# EAGLE board led_display_4x7 (EAGLE 6.5.0)
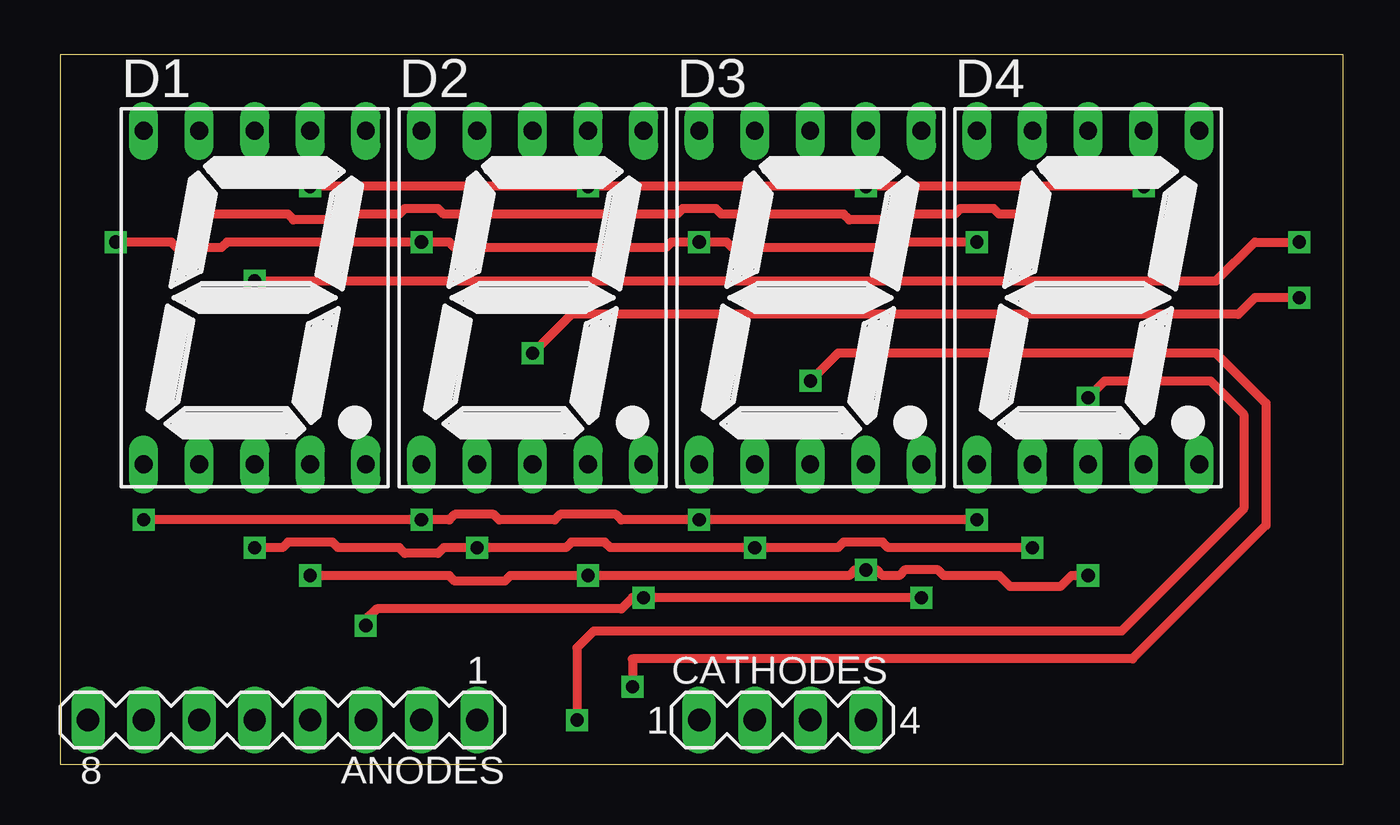
[diagram p0: board, top side]
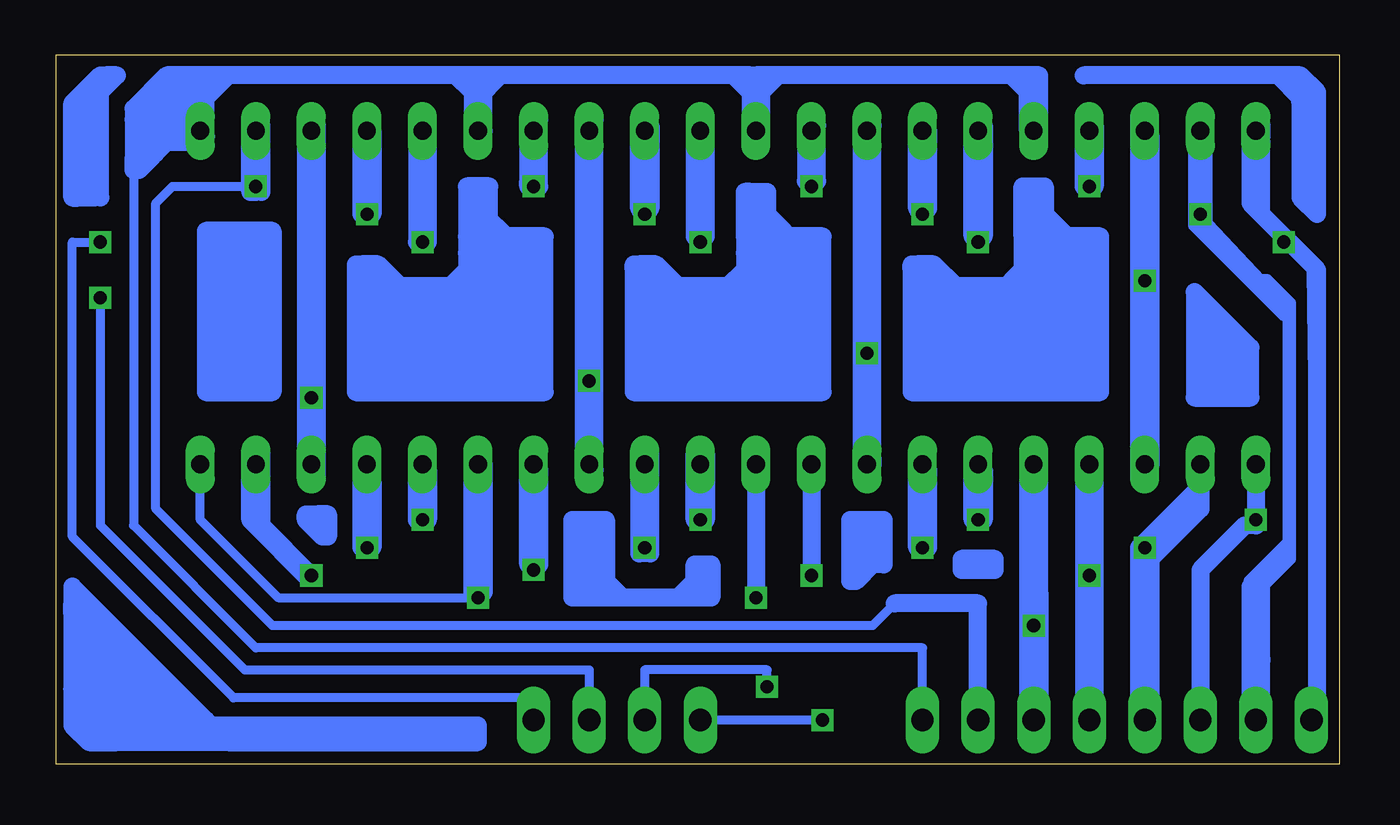
[diagram p1: board, bottom side, seen from below]

Size 58.65 x 32.44 mm. Coordinates in mm from the lower left corner, seen from the top.
Outline: 0,0 58.65,0 58.65,32.44 0,32.44 0,0
Copper layers (1*16): Top 0.035mm / dielectric 1.5mm / Bottom 0.035mm
Design rules "default": minimum track width 10mil, minimum drill 24mil, track to track 8mil, track to pad 8mil, pad to pad 8mil, via to via 8mil, smd to smd 8mil, copper to edge 40mil, drill to drill 8mil, minimum pad ring 10mil, minimum via ring 8mil, stop-mask expansion 4mil, vias tented up to drill 0mil, thermal gap 10mil

## Footprints (pad centres in the part's own frame; a part is rotated, then mirrored left to right if it is on the bottom)
MA08-1 = drill 1.016 long: 1 -8.89,0; 2 -6.35,0; 3 -3.81,0; 4 -1.27,0; 5 1.27,0; 6 3.81,0; 7 6.35,0; 8 8.89,0
MA04-1 = drill 1.016 long: 1 -3.81,0; 2 -1.27,0; 3 1.27,0; 4 3.81,0
7SEG-13 = drill 0.813 long: 1 -5.08,-7.62; 2 -2.54,-7.62; 3 0,-7.62; 4 2.54,-7.62; 5 5.08,-7.62; 6 5.08,7.62; 7 2.54,7.62; 8 0,7.62; 9 -2.54,7.62; 10 -5.08,7.62

## Placement (x,y rotation side)
ANODES  [MA08-1]  10.16,2.03 180 top
CATHODES  [MA04-1]  33.02,2.03 0 top
D1  [7SEG-13]  8.89,21.34 0 top
D2  [7SEG-13]  21.59,21.34 0 top
D3  [7SEG-13]  34.29,21.34 0 top
D4  [7SEG-13]  46.99,21.34 0 top

## Library data of the parts
ANODES CATHODES = con-lstb; OC_FARNELL: unknown; OC_NEWARK: unknown
D1-D4 = special

## Nets
F: ANODES.7 D1.9 D2.9 D3.9 D4.9
G: ANODES.8 D1.10 D2.10 D3.10 D4.10
N$1: ANODES.5 D1.2 D2.2 D3.2 D4.2
N$2: ANODES.6 D1.1 D2.1 D3.1 D4.1
N$3: ANODES.4 D1.4 D2.4 D3.4 D4.4
N$4: ANODES.2 D1.7 D2.7 D3.7 D4.7
N$5: ANODES.1 D1.6 D2.6 D3.6 D4.6
N$7: CATHODES.1 D4.3 D4.8
N$8: CATHODES.2 D3.3 D3.8
N$9: CATHODES.3 D2.3 D2.8
N$10: CATHODES.4 D1.3 D1.8
POINT: ANODES.3 D1.5 D2.5 D3.5 D4.5

## Tracks (layer width: path | path; a pad name or v marks a point on that pad's centre or on a via)
F  (via drill 0.6)
  Top 0.406: v6.35,25.15 10.41,25.15 10.67,24.89 12.19,24.89 12.45,25.15 15.49,25.15 15.75,25.4 17.27,25.4 17.53,25.15 v19.05,25.15 28.19,25.15 28.45,25.4 29.97,25.4 30.23,25.15 v31.75,25.15 35.81,25.15 36.07,24.89 37.59,24.89 37.85,25.15 40.89,25.15 41.15,25.4 42.67,25.4 42.93,25.15 v44.45,25.15
  Bottom 0.406: v6.35,25.15 2.54,21.08 | 2.54,20.83 2.29,20.57 | 2.29,10.16 2.29,9.65 2.54,9.65 | D2.9 v19.05,25.15 | D3.9 v31.75,25.15
  Bottom 0.61: 3.05,21.34 2.29,20.57 | 2.29,20.57 2.29,10.16 | 2.29,10.16 2.29,9.4 3.56,8.13 4.06,8.13 4.06,8.38 2.29,10.16 | 2.29,20.57 2.29,21.08 3.3,22.1 3.56,22.1 | 2.29,20.57 2.54,20.57 6.6,24.64 6.6,28.96 6.1,28.96 6.1,24.64
  Bottom 0.813: 6.6,28.96 D1.9 v6.35,25.15 6.35,24.64 3.05,21.34 2.54,20.83 2.54,21.08 | 44.45,29.21 D4.9 | D4.9 v44.45,25.15 | v31.75,25.15 31.75,29.21 | 3.56,4.83 ANODES.7 3.81,4.57 | 3.81,7.87 3.81,8.13 2.54,9.65 | 19.05,29.46 v19.05,25.15 | 18.8,28.96 18.8,25.4 v19.05,25.15 | v19.05,25.15 19.3,25.4 19.3,29.46 | 31.5,29.21 31.5,25.4 v31.75,25.15 | v31.75,25.15 32,25.4 32,29.21 | D4.9 44.2,28.96 44.2,25.15 44.7,25.15 44.7,29.21 | 3.81,4.57 3.81,7.87 | 3.81,7.87 4.06,8.13 4.06,2.29 | 3.81,4.57 3.56,2.03 3.56,8.38 2.79,9.14
G  (via drill 0.6)
  Top 0.406: v2.54,23.88 5.08,23.88 5.33,23.62 7.37,23.62 7.62,23.88 v16.51,23.88 17.78,23.88 18.03,23.62 27.69,23.62 27.94,23.88 v29.21,23.88 30.48,23.88 30.73,23.62 38.1,23.62 38.35,23.88 v41.91,23.88
  Bottom 0.406: ANODES.8 1.02,2.79 1.27,22.61 v2.54,23.88 3.81,25.15 3.81,25.4 | 3.81,26.16 3.81,28.19 D1.10 | D2.10 v16.51,23.88 | D3.10 v29.21,23.88 | D4.10 v41.91,23.88
  Bottom 0.813: 3.56,25.15 1.02,22.61 1.02,2.79 | 3.56,28.7 D1.10 4.06,29.21 4.06,25.65 3.81,25.4 | v29.21,23.88 29.21,29.21 | v16.51,23.88 16.51,29.21 | 16.26,29.21 16.26,24.13 v16.51,23.88 | v16.51,23.88 16.76,24.13 16.76,29.21 | v29.21,23.88 28.96,24.13 28.96,28.7 29.46,28.7 29.46,26.42 | 29.46,26.42 29.46,24.13 v29.21,23.88 | v29.21,23.88 29.21,26.16 29.46,26.42 | 3.81,26.16 3.81,25.4 | 3.81,25.4 3.56,25.15 | 3.56,25.15 3.56,28.45 | 3.56,28.45 3.56,28.7 | 3.81,29.21 3.56,29.21 3.56,28.7 | 3.56,28.45 3.81,28.19
N$1  (via drill 0.6)
  Top 0.406: v8.89,9.91 10.16,9.91 10.41,10.16 12.45,10.16 12.7,9.91 15.49,9.91 15.75,9.65 17.27,9.65 17.53,9.91 v19.05,9.91 23.11,9.91 23.37,10.16 24.89,10.16 25.15,9.91 v31.75,9.91 35.56,9.91 35.81,10.16 37.59,10.16 37.85,9.91 v44.45,9.91
  Bottom 0.406: ANODES.5 v8.89,9.91 6.35,12.45 6.35,12.7 D1.2
  Bottom 0.813: 9.14,1.78 9.14,9.91 6.35,12.7 | 6.35,12.7 6.35,13.97 | 6.35,12.7 6.35,11.68 8.64,9.4 8.64,2.03 ANODES.5 | D2.2 v19.05,9.91 | D4.2 v44.45,9.91 | 31.75,14.22 D3.2 v31.75,9.91 31.5,9.65 | 31.5,9.65 31.5,14.22 32,14.22 32,9.65 31.5,9.65
N$2  (via drill 0.6)
  Top 0.406: v3.81,11.18 v16.51,11.18 17.78,11.18 18.03,11.43 19.81,11.43 20.07,11.18 22.61,11.18 22.86,11.43 25.4,11.43 25.65,11.18 v29.21,11.18 v41.91,11.18
  Bottom 0.406: ANODES.6 6.35,8.64 v3.81,11.18 D1.1
  Bottom 0.813: D1.1 3.81,10.92 4.32,10.92 6.35,8.89 ANODES.6 | v16.51,11.18 D2.1 16.26,13.46 16.26,11.18 16.76,11.18 16.76,13.72 | 29.46,13.72 29.46,11.43 v29.21,11.18 D3.1 28.96,13.97 | D4.1 v41.91,11.18
N$3  (via drill 0.6)
  Top 0.406: v11.43,8.64 17.78,8.64 18.03,8.38 20.32,8.38 20.57,8.64 v24.13,8.64 36.07,8.64 36.32,8.89 v36.83,8.89 37.34,8.89 37.59,8.64 38.35,8.64 38.61,8.89 40.13,8.89 40.39,8.64 42.93,8.64 43.43,8.13 45.72,8.13 46.23,8.64 v46.99,8.64
  Bottom 0.406: 11.43,9.91 v11.43,8.64 ANODES.4 | D4.4 49.53,11.18
  Bottom 0.813: 11.43,4.57 ANODES.4 | D2.4 v24.13,8.64 | D3.4 v36.83,8.89 | 49.53,11.18 49.53,10.92 | 49.53,10.92 47.24,8.64 v46.99,8.64 49.28,10.92 | 11.43,13.97 D1.4 11.43,9.91 ANODES.4 | ANODES.4 11.18,1.78 11.18,13.72 11.43,13.97 | 11.43,13.97 11.68,13.97 11.68,1.78 ANODES.4 | 49.28,10.92 49.53,11.18 | 49.53,11.18 49.53,13.97 49.28,14.22 49.28,10.92 | 49.28,10.92 49.53,10.92 | 49.53,10.92 49.78,11.18 49.78,14.22
N$4  (via drill 0.6)
  Top 0.406: v11.43,26.42 v24.13,26.42 v36.83,26.42 v49.53,26.42
  Bottom 0.406: D3.7 v36.83,26.42 | v49.53,26.42 53.34,26.42 54.1,25.65 54.1,11.68 48.77,6.35 21.34,6.35 20.32,7.37
  Bottom 0.813: v11.43,26.42 D1.7 | D4.7 v49.53,26.42 | 37.08,28.96 37.08,26.67 | 37.08,26.67 v36.83,26.42 | v36.83,26.42 36.58,26.42 36.58,29.46 | D2.7 v24.13,26.42 | ANODES.2 16.51,7.37 20.32,7.37 | v24.13,26.42 23.88,26.67 23.88,29.21 24.38,29.21 24.38,26.67 v24.13,26.42 | v36.83,26.42 37.08,26.42 37.08,26.67
N$5
  Bottom 0.406: ANODES.1 19.05,5.33 49.53,5.33 55.12,10.92 55.12,27.18 55.12,29.46 53.34,31.5 52.07,31.5 | 52.07,31.5 50.8,31.5 | D1.6 13.97,31.24 13.97,31.5 14.22,31.5 | 52.07,31.24 52.07,31.5
  Bottom 0.813: 14.22,28.96 14.22,30.73 | 14.22,30.73 14.22,30.99 13.97,31.24 14.22,31.5 | 14.22,31.5 14.99,31.5 | 14.99,31.5 25.65,31.5 | 25.65,31.5 26.67,31.5 | 26.92,31.5 27.69,31.5 | 27.69,31.5 38.35,31.5 | 38.35,31.5 39.12,31.5 | 39.37,31.5 39.62,31.5 | 39.62,31.5 40.39,31.5 | 40.39,31.5 50.8,31.5 | 50.8,31.5 53.34,31.5 53.59,31.5 55.12,29.97 55.12,29.46 55.12,27.69 | D4.6 52.07,30.48 | 52.07,30.48 52.07,31.24 | 39.37,30.48 D3.6 39.62,28.7 | 39.37,30.48 39.37,31.5 | 13.72,28.96 13.72,31.5 14.22,31.5 | D2.6 26.67,30.48 | 26.67,30.48 26.67,31.5 | 39.12,28.96 39.12,31.5 | 39.12,31.5 39.37,31.5 | 39.62,31.5 39.62,30.73 | 39.62,30.73 39.62,28.96 39.37,28.7 | 26.92,31.5 26.92,29.21 26.42,29.72 26.42,30.73 | 26.42,30.73 26.42,31.24 | 55.12,27.18 55.12,27.69 | 55.12,27.69 54.61,27.69 53.34,28.96 53.34,28.45 | 53.34,28.45 53.09,28.45 | 53.09,28.45 52.32,28.45 52.83,28.96 52.83,28.7 53.09,28.45 | 53.34,28.45 53.59,28.45 | 53.59,28.45 54.1,28.45 54.1,27.94 55.12,27.18 | 55.12,27.69 54.86,28.19 53.59,28.45 | 53.59,28.45 54.86,27.18 55.12,27.18 | 55.12,27.18 54.61,29.46 54.61,29.72 53.34,30.99 52.58,30.99 52.58,29.46 52.83,29.21 54.1,29.21 54.36,28.96 54.36,29.21 52.83,30.73 52.83,29.97 53.34,29.46 | 52.07,30.48 51.82,30.48 50.8,31.5 | 39.62,30.73 40.39,31.5 | 39.37,30.48 38.35,31.5 | 26.67,30.48 27.69,31.5 | 26.92,31.5 26.67,31.5 | 25.65,31.5 26.42,30.73 | 14.22,30.73 14.99,31.5
N$6
  Bottom 0.813: 56.64,25.91 56.64,30.73 | 56.9,30.48 56.64,30.73 | 56.9,30.48 56.9,30.73 | 56.9,30.48 56.9,25.91 57.66,25.91 | 56.39,31.5 56.64,31.5 57.91,30.23 57.91,25.91 57.66,25.91 | 56.13,31.5 55.88,31.5 56.64,30.73 | 56.13,31.5 57.4,30.23 57.4,26.16 | 56.13,31.5 56.39,31.5 | 56.39,31.5 56.9,30.99 | 57.66,25.91 57.15,26.16
N$7  (via drill 0.6)
  Top 0.406: v46.99,16.76 47.75,17.53 52.58,17.53 54.1,16 54.1,11.68 48.51,6.1 24.38,6.1 23.62,5.33 v23.62,2.03
  Bottom 0.406: v23.62,2.03 CATHODES.1 | D4.8 v46.99,16.76 D4.3
  Bottom 0.813: D4.8 46.99,13.46
N$8  (via drill 0.6)
  Top 0.406: v34.29,17.53 35.56,18.8 52.83,18.8 55.12,16.51 55.12,10.92 49.02,4.83 26.16,4.83 v26.16,3.56
  Bottom 0.406: v34.29,17.53 D3.3 | v26.16,3.56 26.16,4.32 31.75,4.32 CATHODES.2
  Bottom 0.813: D3.8 D3.3
N$9  (via drill 0.6)
  Top 0.406: v56.64,21.34 54.61,21.34 53.85,20.57 23.37,20.57 v21.59,18.8
  Bottom 0.406: D2.3 v21.59,18.8 D2.8 | v56.64,21.34 56.64,10.92 50.04,4.32 34.29,4.32 CATHODES.3
  Bottom 0.813: D2.8 D2.3 21.34,13.97 | 21.34,13.97 21.34,13.72 | 21.34,13.97 21.34,29.21 21.84,29.21 21.84,13.46
N$10  (via drill 0.6)
  Top 0.406: v8.89,22.1 52.83,22.1 54.61,23.88 v56.64,23.88
  Bottom 0.406: D1.8 v8.89,22.1 D1.3 | CATHODES.4 36.83,3.05 50.55,3.05 57.91,10.41 57.91,23.88 v56.64,23.88
  Bottom 0.813: D1.8 8.89,13.21
N$11
  Bottom 0.813: 42.16,28.96 42.16,23.88 41.66,23.88 41.66,29.21 42.16,29.21
N$12
  Bottom 0.813: 50.8,1.02 55.88,1.02 | 56.64,2.03 55.63,1.02 57.66,1.78 | 56.64,2.03 51.82,2.03 | 51.82,2.03 50.8,1.02 | 51.82,2.03 57.91,8.13 57.91,7.37 | 57.66,1.78 57.91,3.56 | 57.91,4.83 56.64,2.03 | 57.66,1.78 57.91,1.78 | 57.91,4.83 57.91,3.56 | 57.91,2.54 57.91,1.78 | 57.91,1.78 57.15,1.02 55.88,1.02 | 55.88,1.02 57.91,3.05 | 57.91,3.56 57.91,3.05 | 57.91,3.05 57.91,2.54 | 57.91,2.54 57.4,1.78 57.4,3.56 57.15,3.81 | 57.15,3.81 57.66,3.81 57.91,4.83 | 57.91,6.86 57.91,7.37 | 55.88,4.57 53.59,2.29 54.86,2.29 56.9,4.32 | 54.61,2.79 56.39,4.57 56.39,4.83 56.9,4.32 | 56.9,4.32 56.9,3.3 55.37,1.78 55.37,1.52 55.12,1.27 51.82,1.27 55.37,4.83 | 57.91,7.37 55.37,4.83 | 55.37,4.83 56.13,4.83 57.91,6.86 | 57.91,6.86 57.91,4.83 | 57.66,1.78 57.15,3.81 | 57.15,3.81 57.15,4.32 | 57.15,4.32 57.15,5.08 57.66,5.59 57.66,5.08 57.15,4.32 | 50.8,1.02 39.37,1.02 39.37,1.78 40.89,1.78 | 40.89,1.78 52.07,1.78 | 40.89,1.78 41.4,1.27
N$13
  Bottom 0.813: 15.75,20.57 15.75,21.34 14.22,22.86
N$14
  Bottom 0.813: 2.79,31.5 2.29,31.5 1.78,31.5 1.02,30.73 1.02,25.15 1.78,25.91 1.78,30.23 | 2.79,31.5 1.78,30.48 | 1.78,30.48 1.27,29.97 1.52,29.97 1.78,30.23 | 1.78,30.23 1.78,30.48 | 2.79,31.5 11.68,31.5
N$16
  Bottom 0.813: 49.53,26.16 49.78,26.16 49.78,29.21 | 49.53,26.16 49.53,29.21 | 49.28,29.21 49.28,26.16 49.53,26.16
N$18
  Bottom 0.813: 6.6,16.76 6.6,21.59 4.06,19.05 4.06,16.76 4.32,16.76 | 6.6,16.76 4.32,16.76 | 4.32,16.76 4.32,18.29 6.35,20.32 6.35,17.27 6.1,17.02 4.83,17.02 4.57,17.27 4.57,17.78 5.84,19.05 5.84,17.53 5.33,17.53 | 5.08,17.53 5.33,17.53 | 5.33,17.53 5.59,17.78 5.84,17.78 6.1,18.03 6.1,17.27 6.6,16.76
N$19
  Bottom 0.813: 19.3,17.02 19.3,22.61 19.56,22.86 | 19.56,22.86 19.3,22.86 | 18.54,22.86 19.3,22.86 | 19.3,22.86 19.56,22.61 | 19.56,22.61 19.56,17.02 19.3,17.02 | 19.3,17.02 10.92,17.02 10.92,24.13 12.45,24.13 | 12.45,24.13 12.95,24.13 | 13.46,24.13 14.48,24.13 | 14.48,24.13 14.48,23.37 | 14.48,22.61 14.48,22.1 14.22,21.84 17.53,21.84 18.54,22.86 | 18.54,22.86 18.54,22.1 18.8,21.84 18.8,17.78 11.43,17.78 11.43,22.61 | 11.43,22.61 11.43,23.11 11.68,23.37 11.68,23.62 14.22,23.62 14.48,23.37 | 14.48,23.37 14.48,22.61 | 14.48,22.61 13.72,21.84 11.43,21.84 11.18,22.1 11.94,22.1 12.95,23.11 12.19,23.11 12.7,22.61 | 12.7,22.61 13.97,22.61 13.97,23.11 11.94,23.11 11.43,22.61 | 11.43,22.61 12.7,22.61 | 12.7,22.61 13.97,21.34 18.03,21.34 18.54,21.84 | 19.56,22.61 19.56,22.86 | 13.97,21.84 13.97,23.62 14.48,24.13 | 14.48,24.13 14.48,26.42 13.72,26.42 | 13.72,26.42 13.72,24.89 12.95,24.13 | 12.95,24.13 13.46,24.13 | 13.46,24.13 13.97,24.64 | 13.72,26.42 13.46,26.42 13.46,25.15 12.45,24.13
N$20
  Bottom 0.813: 32,17.02 23.62,17.02 23.62,24.13 25.65,24.13 | 26.16,24.13 27.18,24.13 | 27.18,24.13 27.18,23.37 | 27.18,22.61 27.18,22.1 26.92,21.84 27.94,21.84 | 27.94,21.84 30.23,21.84 | 31.5,17.78 24.13,17.78 24.13,22.61 | 24.13,22.61 24.13,23.11 24.38,23.37 24.38,23.62 26.92,23.62 27.18,23.37 | 27.18,23.37 27.18,22.61 | 27.18,22.61 26.42,21.84 24.13,21.84 23.88,22.1 24.64,22.1 25.65,23.11 24.89,23.11 25.4,22.61 | 25.4,22.61 26.67,22.61 26.67,23.11 24.64,23.11 24.13,22.61 | 24.13,22.61 25.4,22.61 | 25.4,22.61 26.67,21.34 30.73,21.34 | 27.94,21.84 27.18,22.61 | 27.18,24.13 27.18,25.91 | 27.18,25.91 26.92,26.16 | 26.92,26.16 27.18,26.16 27.18,25.91 | 26.92,26.16 26.42,26.16 | 26.42,26.16 26.42,25.4 | 26.42,25.4 26.42,24.89 25.65,24.13 | 25.65,24.13 26.16,24.13 | 26.16,24.13 26.67,24.64 | 26.42,26.16 26.16,26.16 26.16,24.89 25.91,24.89 | 25.91,24.89 25.4,24.38 | 25.91,24.89 26.42,25.4
N$21
  Bottom 0.813: 32,17.02 32,22.61 32.26,22.86 | 32.26,22.86 32,22.86 | 31.24,22.86 32,22.86 | 32,22.86 32.26,22.61 | 32.26,22.61 32.26,21.59 32.26,17.02 32,17.02 | 32,17.02 23.62,17.02 | 26.92,21.84 30.23,21.84 31.24,22.86 | 31.24,22.86 31.24,22.1 31.5,21.84 31.5,17.78 24.13,17.78 | 26.67,21.34 30.73,21.34 31.24,21.84 | 32.26,22.61 32.26,22.86
N$22
  Bottom 0.813: 38.1,24.13 36.32,24.13 36.32,17.02 44.7,17.02 | 38.1,24.13 38.86,24.13 | 38.86,24.13 39.62,24.13 | 39.88,24.13 39.88,23.37 | 39.88,22.61 39.88,22.1 39.62,21.84 42.93,21.84 43.94,22.86 | 36.83,22.61 36.83,17.78 44.2,17.78 44.2,21.84 43.94,22.1 43.94,22.86 | 36.83,22.61 36.83,23.11 37.08,23.37 37.08,23.62 39.62,23.62 39.88,23.37 | 39.88,23.37 39.88,22.61 | 39.88,22.61 39.12,21.84 36.83,21.84 36.58,22.1 37.34,22.1 38.35,23.11 37.59,23.11 38.1,22.61 | 38.1,22.61 39.37,22.61 39.37,23.11 37.34,23.11 36.83,22.61 | 36.83,22.61 38.1,22.61 | 38.1,22.61 39.37,21.34 43.43,21.34 43.94,21.84 | 39.88,22.61 40.89,21.59 43.69,21.59 44.7,22.61 | 44.7,17.02 44.7,22.61 | 44.7,22.61 44.96,22.86 | 44.96,22.86 44.7,22.86 | 43.94,22.86 44.7,22.86 | 44.7,22.86 44.96,22.61 44.96,17.02 44.7,17.02 | 44.96,22.86 44.96,22.1 43.94,21.08 | 38.86,24.13 38.86,26.42 39.88,26.42 39.88,24.13 | 39.88,24.13 39.62,24.13 | 39.62,24.13 39.37,24.38 39.37,25.91 | 39.12,25.4 39.12,25.15 38.1,24.13
N$23
  Bottom 0.813: 11.18,29.21 11.18,26.42 11.68,26.42 11.68,29.21
N$24
  Bottom 0.813: 48.77,24.38 51.82,24.38 51.82,17.02 48.77,17.02 48.77,24.38
N$25
  Bottom 0.813: 8.64,28.7 8.64,13.72 9.14,13.72 9.14,28.96
N$26
  Bottom 0.813: 19.05,13.97 19.05,13.72 18.8,13.46 18.8,9.91 19.3,9.91 19.3,13.97
N$27
  Bottom 0.813: 51.82,28.7 51.82,31.24 52.32,31.24 52.32,28.96 52.07,28.7
N$28
  Bottom 0.813: 28.96,14.22 28.96,11.18 29.46,11.18 | 29.21,13.97 29.21,11.43 29.46,11.18 | 29.46,11.18 29.46,14.22
N$29
  Bottom 0.813: 30.23,7.62 28.7,7.62 28.7,7.87 | 30.23,7.62 32.77,7.62 | 33.78,7.62 35.05,7.62 35.05,11.18 33.53,11.18 33.53,8.38 32.77,7.62 | 32.77,7.62 33.78,7.62 | 33.78,7.62 34.54,8.38 34.54,10.41 34.29,10.41 34.04,10.67 34.04,8.13 | 30.23,7.62 29.46,8.38 29.46,9.14 28.7,9.14 28.7,8.38 | 28.7,8.38 28.7,7.87 | 28.7,7.87 28.96,7.87 29.21,8.13 | 28.96,8.38 28.7,8.38
N$30
  Bottom 0.813: 34.29,13.46 34.04,13.46 34.04,29.46 34.54,29.46 34.54,13.46 34.29,13.21
N$31
  Bottom 0.813: 37.08,13.72 36.83,13.72 36.58,13.46 36.58,9.14 37.08,9.14 37.08,13.97
N$32
  Bottom 0.813: 42.16,13.72 41.91,13.72 41.66,13.46 41.66,11.18 42.16,11.18 42.16,13.97
N$33
  Bottom 0.813: 44.7,13.72 44.7,13.46 44.2,12.95 44.2,9.91 44.7,9.91 44.7,13.97
N$34
  Bottom 0.813: 47.24,13.46 46.99,13.46 46.74,13.21 46.74,29.21 46.99,29.46 47.24,29.46 47.24,13.21
N$36
  Bottom 0.813: 46.23,11.43 46.23,10.41 46.48,10.41 47.24,11.18 47.24,11.43 46.74,11.43 | 46.74,11.43 46.48,11.18 46.23,11.43 | 46.23,11.43 46.74,11.43
N$37
  Bottom 0.813: 20.83,11.18 20.83,9.14 21.34,9.14 22.1,8.38 22.35,8.38 22.35,11.18 20.83,11.18
N$38
  Bottom 0.813: 21.08,10.92 21.08,9.91 21.84,9.14 21.84,10.67 21.59,10.92
N$39
  Bottom 0.813: 15.75,9.4 17.27,9.4 17.27,8.89 15.75,8.89 15.75,9.4
POINT  (via drill 0.6)
  Top 0.406: v13.97,6.35 13.97,6.6 14.48,7.11 25.65,7.11 26.16,7.62 v26.67,7.62 v39.37,7.62
  Bottom 0.406: D3.5 v39.37,7.62 48.51,7.62 52.07,11.18 D4.5 52.07,13.97
  Bottom 0.813: D1.5 v13.97,6.35 | v13.97,6.35 ANODES.3 | ANODES.3 13.97,4.57 | D2.5 v26.67,7.62 | v39.37,7.62 39.37,13.97 39.12,13.72 39.12,7.87 v39.37,7.62 | v13.97,6.35 13.72,7.87 | 13.72,7.87 13.72,1.52 | 13.72,7.87 13.72,13.72 14.22,13.72 14.22,1.78 ANODES.3 | v39.37,7.62 39.62,7.87 39.62,14.22
(copper drawn outside any net)
  shapes: Bottom area x6